# Altium PCB PCBII_COPY.PcbDoc (part 2 of 2)
Units mil, origin at the board's own origin, x right, y up, seen from the top; angles counter-clockwise.
Board outline 1365 x 1450 mil, 2 copper layers (Top Layer, Bottom Layer); 54 components, 41 nets, 198 pads, 63 vias.
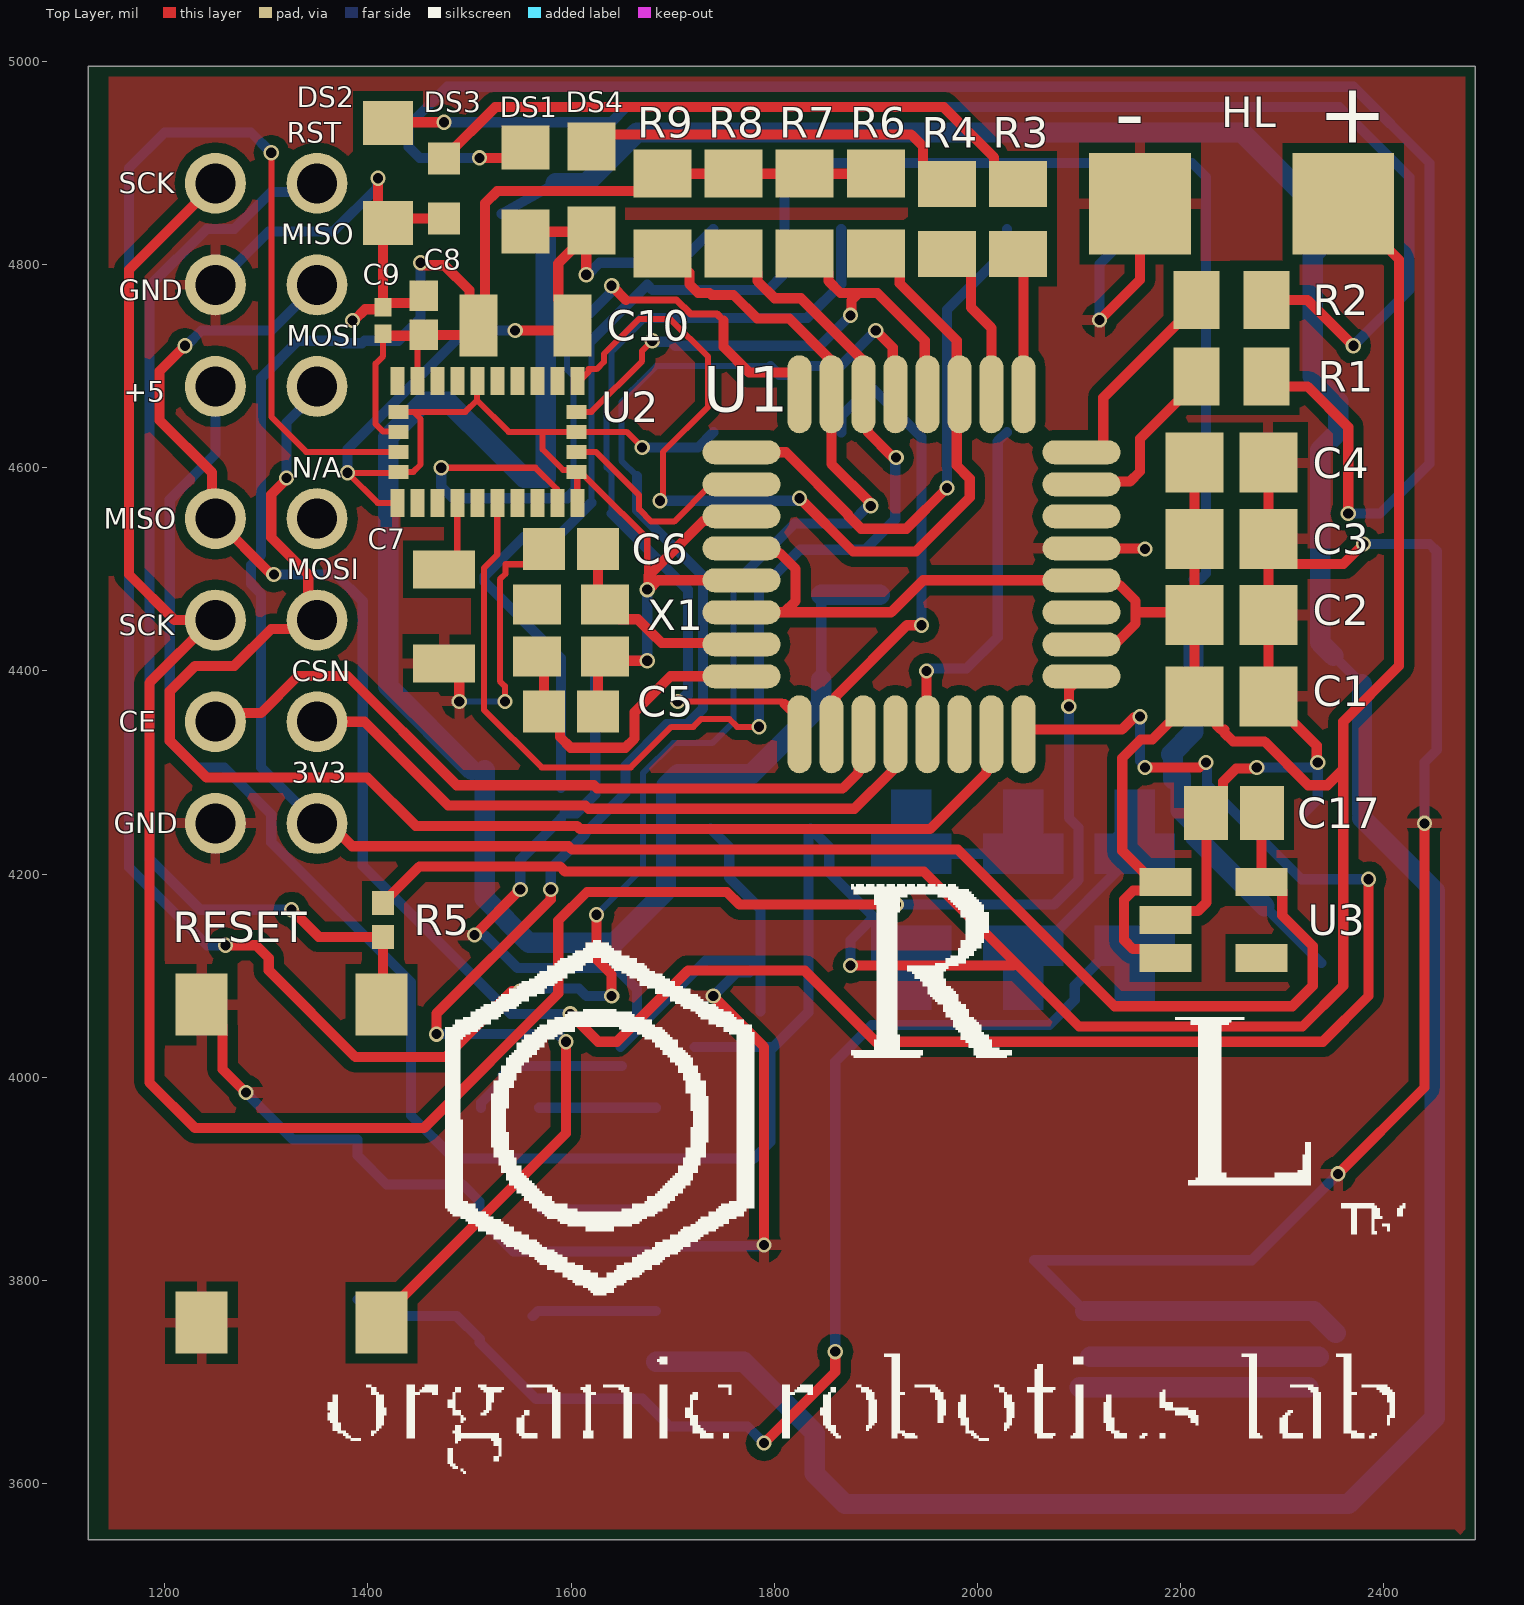
[diagram p0: Top Layer view]

## Via types
v1: diameter 15, hole 10, Top Layer to Bottom Layer, tented both sides, 63 vias

## Nets (pads, with @x,y where several pads share a name; then routed paths per layer and width w, separated by ;. In a path a pad name is that pad's centre, name@x,y a point inside that pad or via, vN(x,y) a via of type N, cw(c..) or ccw(c..) an arc to the next point about the centre after c; other vN are vias at no path point) (continued)
NetDS2_1: (continued)
  Bottom Layer w10: v1(1475,4940) 1639.64,4940 1654.64,4955 2356.21,4955 2425,4886.21 2425,4775 v1(2370,4720)
NetDS3_1: DS3.1 R3.2 | length 622
  Top Layer w10: DS3.1 1525.43,4954.96 1966.88,4954.96 2016.46,4905.39 2016.46,4897.09 2034.09,4879.45 R3.2
NetDS4_1: DS4.1 R4.2 | length 386.2
  Top Layer w10: DS4.1 1631.65,4927.99 1934.76,4927.99 1946.46,4916.29 1946.46,4897.09 1964.09,4879.45 R4.2
NetL1_1: L1.1 L3.1 | length 148.2
  Bottom Layer w10: L3.1 2064.68,4129.45 2079.37,4144.13 2079.37,4144.92 L1.1@2137.66,4203.21 ; L1.1@2127.66,4227.66 2145,4245
NetL2_1: L2.1 L3.2 | length 110
  Bottom Layer w10: L2.1 L3.2
NetR1_1: R1.1 U1.23 | length 179.6
  Top Layer w10: U1.23 2104.93,4586.35 2150.05,4586.35 2160,4596.29 2160,4628.54 2215.55,4684.09 R1.1
NetR2_1: R2.1 U1.24 | length 198.9
  Top Layer w10: U1.24 2117.61,4615.24 2123.9,4621.53 2123.9,4668.9 2210,4755 R2.1@2215.55,4755
NetR3_1: R3.1 U1.25 | length 140.4
  Top Layer w10: R3.1 2045.24,4805.31 U1.25
NetR4_1: R4.1 U1.26 | length 159.8
  Top Layer w10: R4.1 1975.91,4810.55 1993.54,4792.91 1993.54,4757.85 2013.74,4737.65 U1.26
NetR11_2: R11.2 U4.5 | length 112.8
  Bottom Layer w10: R11.2 U4.5
NetRESET_2: RESET.2 U1.29 | length 1615.4
  Top Layer w10: RESET.2 1413.58,3763.43 1595,3944.84 v1(1595,4035) ; v1(1467.5,4042.5) 1467.5,4062.6 1580,4175.1 v1(1580,4185) ; v1(1900,4735) 1916.65,4718.35 1916.65,4674.93 U1.29
  Bottom Layer w6: 1655,4670.13 1649.5,4664.63 1649.5,4607.09 1665,4591.59 ; 1655,4671.21 1667.54,4683.76 1683.79,4700 1796.21,4700
  Bottom Layer w10: v1(1467.5,4042.5) 1587.5,4042.5 v1(1595,4035) ; v1(1580,4185) 1580,4205.32 1613.86,4239.18 1613.86,4240.42 1653.54,4280.11 1653.54,4292.36 1653.54,4306.85 1694.19,4347.5 1714.32,4347.5 1730,4363.18 1730,4493.18 1665,4558.18 1665,4591.59 ; 1796.21,4700 1805,4691.21 1821.39,4691.21 1830.18,4700 1865,4700 v1(1900,4735)
nReset: R8.2 U1.30 U2.11 | length 1171.1
  Top Layer w6: U2.11 1527.44,4514.43 1514.5,4501.49 1514.5,4361.51 1571.01,4305 1658.88,4305 1698.88,4345 1720.41,4345 1727.91,4352.5 1755.97,4352.5 1763.47,4345 v1(1785,4345)
  Top Layer w10: R8.2 1764.92,4810.63 1783.54,4792.01 1783.54,4783.71 1800.4,4766.86 1826.22,4766.86 1885.15,4707.92 1885.15,4644.67 1892.44,4637.38 1892.44,4634.64 1916.13,4610.96 1919.04,4610.96 v1(1920,4610)
  Bottom Layer w10: v1(1785,4345) 1785,4479.09 1825.24,4519.33 1889.33,4519.33 1919.16,4549.16 1919.16,4609.16 v1(1920,4610)
PP12V0: *.2 Q1.1 Q1.2 Q1.3 | length 402.3
  Bottom Layer w10: *.2@2282.6,4168.34 *.2@2338.46,4112.48
  Bottom Layer w20: 2197.43,4293.54 2192.43,4293.54 2192.5,4293.61 2192.5,4316.39 2190.76,4318.13 Q1.1 Q1.2 Q1.3 ; 2200,4296.11 2200,4262.89 2214.37,4248.52 2214.37,4236.57 *.2@2282.6,4168.34
RST: ICSP.6 R5.2 RESET.1 | length 1099.8
  Top Layer w10: v1(1325,4165) 1351.73,4138.27 R5.2 1415,4072.91 RESET.1
  Bottom Layer w10: v1(1325,4165) 1235,4165 1185,4215 1185,4778.64 1241.36,4835 1268.64,4835 1305,4871.36 1341.36,4871.36 ICSP.6
SCK: ICSP.5 J2.5 U1.17 | length 2300.6
  Top Layer w10: J2.5 J2.5@1246.72,4450 ; ICSP.5 1165,4795 1165,4495 1210,4450 J2.5@1246.72,4450 ; v1(1920,4170) 1765.91,4170 1753.41,4182.5 1615.68,4182.5 1587.5,4154.32 1587.5,4082.5 1455,3950 1230,3950 1185,3995 1185,4388.28 J2.5@1246.72,4450 ; v1(2090,4365) 2090,4382.44 U1.17
  Bottom Layer w10: v1(1920,4170) 2075.27,4170 2099.37,4194.1 2099.37,4245.9 2090,4255.27 v1(2090,4365)
SCL: R7.1 U1.28 U2.19 | length 557
  Top Layer w6: U2.19 1620,4655 1670,4705 1670,4715 v1(1680,4725)
  Top Layer w10: R7.1 1834.92,4810.63 1853.54,4792.01 1853.54,4783.71 1865.24,4772.01 1883.33,4772.01 ; v1(1875,4750) 1875.96,4750.96 1875.96,4764.64 1883.33,4772.01 ; U1.28 1948.14,4674.93 1948.14,4725.28 1901.41,4772.01 1883.33,4772.01
  Bottom Layer w10: v1(1680,4725) 1680.96,4724.04 1698.46,4724.04 1702.5,4720 1845,4720 v1(1875,4750)
SDA: R6.1 U1.27 U2.20 | length 965.5
  Top Layer w6: U2.20@1608.39,4685.51 1617.36,4694.49 1617.36,4696.93 1617.42,4696.99 1625.14,4696.99 1632.46,4704.31 1632.46,4712.03 1666.77,4746.34 1697.88,4746.34 1735,4709.22 1735,4660 1690.5,4615.5 1690.5,4570.5 v1(1687.5,4567.5)
  Top Layer w10: v1(1825,4570) 1877.5,4517.5 1939.32,4517.5 1992.5,4570.68 1992.5,4589.32 1979.64,4602.18 1979.64,4725.19 1923.54,4781.28 1923.54,4792.01 1904.92,4810.63 R6.1
  Bottom Layer w10: v1(1687.5,4567.5) 1822.5,4567.5 v1(1825,4570)
SS: U1.14
pads on no net: J2.8 U1.19 U1.22 U2.1 U2.7 U2.8 U2.10 U2.12 U2.13 U2.21 U2.22 U2.23 U2.24 U2.26 U2.27 U3.4 X1.4

## Polygon pours and split planes (outlines as drawn)
GND on Top Layer "Top Layer-GND" (solid, pour order 1): 2480,4985 2480,3555 2475,3550 2470,3555 1145,3555 1145,4985
GND on Bottom Layer "GND_L02_P002" (solid, pour order 2): 1145,3555 2475,3555 2475,4985 1145,4985

## Silkscreen, mask and mechanical layers (free items; w line width, h text height)
Top Overlay:
  drawing of 51 lines, arcs and shapes, not listed
  text "RST" at 1320,4920 h20
  text "-" at 2135,4920 h60
  text "+" at 2335,4920 h60
  text "SCK" at 1155,4870 h20
  text "MISO" at 1315,4820 h20
  text "GND" at 1155,4765 h20
  text "MOSI" at 1320,4720 h20
  text "+5" at 1160,4665 h20
  text "N/A" at 1325,4590 h20
  text "MISO" at 1140,4540 h20
  text "MOSI" at 1320,4490 h20
  text "SCK" at 1155,4435 h20
  text "CSN" at 1325,4390 h20
  text "CE" at 1155,4340 h20
  text "3V3" at 1325,4290 h20
  text "GND" at 1150,4240 h20
Bottom Overlay:
  text "+12" at 2400,4920 h30
  text "GND" at 2200,4905 h30
  text "GND" at 1780,4900 h30
  text "SIG3" at 1915,4900 h30
  text "SIG1" at 2080,4900 h30
  text "+12" at 1580,4895 h30
  text "+12" at 1585,4700 h30
  text "SIG2" at 2080,4700 h30
  text "GND" at 2205,4700 h30
  text "GND" at 1790,4695 h30
  text "SIG4" at 1920,4695 h30
  text "+12" at 2400,4695 h30
  text "+" at 2380,3960 h60
  text "-" at 2380,3815 h60
  text "Jade Pinkenburg" at 1595,3575 h30
Mechanical 1:
  lines w10: 1130,3545 1130,4995 2485,4995 2485,3545 1130,3545